# Altium PCB Remote Board.PcbDoc
Units mm, origin at the board's own origin, x right, y up, seen from the top; angles counter-clockwise.
Board outline 100 x 55 mm, 2 copper layers (Top Layer, Bottom Layer); 38 components, 37 nets, 162 pads, 45 vias.
Unrouted connection lines stored in the file: 4.
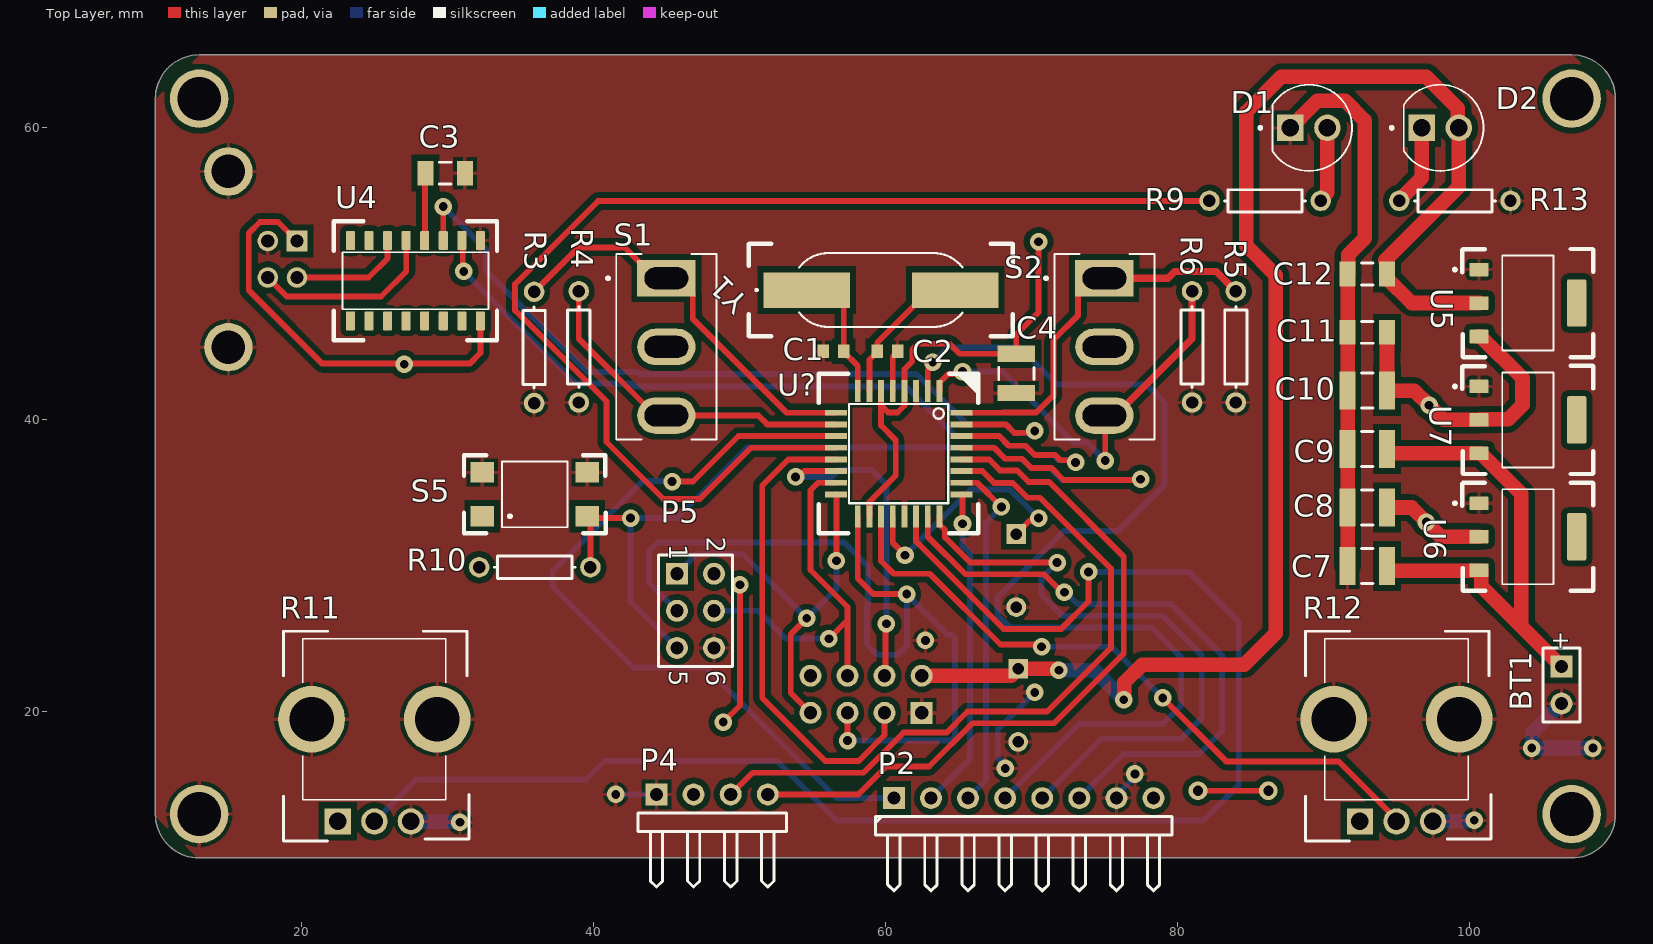
[diagram p0: Top Layer view]
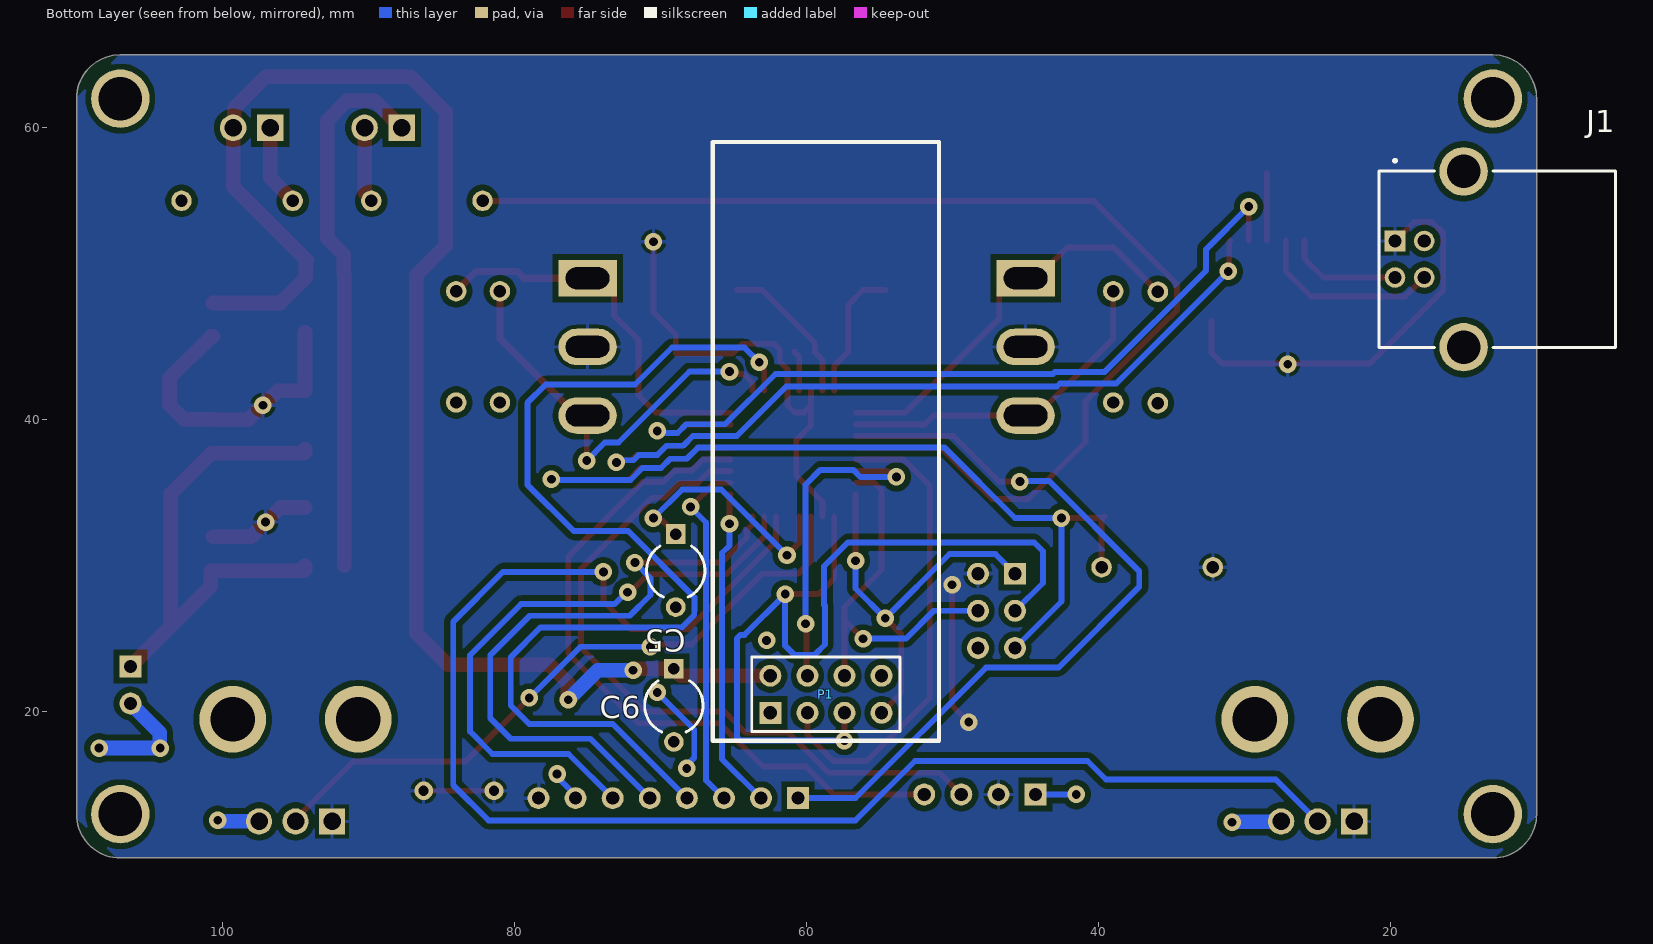
[diagram p1: Bottom Layer view, seen from below]

## Layer stack, top to bottom
Top Solder: solder mask 0.0102, Solder Resist, Dk 3.5
Top Layer: signal copper 0.0356
Dielectric 1: dielectric 0.32, FR-4, Dk 4.8
Bottom Layer: signal copper 0.0356
Bottom Solder: solder mask 0.0102, Solder Resist, Dk 3.5

## Board outline
10,13 ccw(c13,13) 13,10 107,10 ccw(c107,13) 110,13 110,62 ccw(c107,62) 107,65 13,65 ccw(c13,62) 10,62

## Design rules (kind name [scope] priority, off if disabled: settings)
Clearance [All] p1: gap=0.4 ignorepadtopadclearanceinfootprint=TRUE
Height [All] p1: minheight=0 maxheight=40 prefheight=12.7
PolygonConnect [All] p1: connectstyle=Relief reliefconductorwidth=0.254 reliefentries=4 polygonreliefangle="90 Angle" airgapwidth=0.254
RoutingTopology [All] p1: topology=Daisy_Balanced
RoutingVias [All] p1: holewidth=0.711 width=1.27 viastyle="Through Hole" minholewidth=0.711 minwidth=1.27 maxholewidth=0.711 maxwidth=1.27
SolderMaskExpansion [All] p1: expansion=0.102 istentingtop=FALSE
Width [All] p1: maxlimit=1 minlimit=0.4 preferedwidth=0.4
28 further rules are at their usual default settings.

## Components (designator, comment, footprint, x,y, rotation, side; value= is the part's Value field where it differs from the comment)
BT1 "Battery" BAT-2 106.299,21.844 r270 top
C1 "Cap Semi" 1608[0603] 56.45,44.704 r180 top value=22pF
C2 "Cap Semi" 1608[0603] 60.136,44.704 r0 top value=22pF
C3 "Cap Semi" C1206 29.845,56.896 r0 top value=0.1uF
C4 "Cap Semi" C1210 68.961,43.18 r270 top value=10uF
C5 "Cap2" CAPR5-4X5 68.961,29.678 r270 bottom value=0.1uF
C6 "Cap2" CAPR5-4X5 69.088,20.447 r270 bottom value=10uF
C7 "Cap" C1210 93,30 r180 top value=10uF
C8 "Cap" C1210 93,34 r180 top value=10uF
C9 "Cap" C1210 93,38 r180 top value=10uF
C10 "Cap" C1210 93,42 r180 top value=10uF
C11 "Cap" C1206 93,46 r180 top value=10uF
C12 "Cap" C1206 93,50 r180 top value=10uF
D1 "L08R5000Q1" LEDRD254W57D500H1070 89,60 r0 top
D2 "Power" LEDRD254W57D500H1070 98,60 r0 top
J1 "USB-B" SAMTEC_USB-B-S-X-X-TH 15,51 r90 bottom locked
P1 "nRF24+PA+LNA" nRF24+PA+LNA 58.674,21.209 r180 bottom
P2 "Header 8H" HDR1X8H 60.579,14.097 r0 top
P4 "LCD I2C" HDR1X4H 44.323,14.351 r0 top
P5 "ISP" HDR2X3 45.72,29.464 r270 top
R3 "Res1" AXIAL-0.3 35.941,44.958 r90 top value=1K
R4 "Res1" AXIAL-0.3 39,45 r90 top value=1K
R5 "Res1" AXIAL-0.3 84,45 r90 top value=1K
R6 "Res1" AXIAL-0.3 81,45 r90 top value=1K
R9 "Res1" AXIAL-0.3 86,55 r0 top value=150
R10 "Res1" AXIAL-0.3 35.985,29.907 r180 top value=1K
R11 "RPot_1" RV09AF4020KA54 25,16 r0 top locked value=1K
R12 "RPot_1" RV09AF4020KA54 95,16 r0 top locked value=1K
R13 "Res1" AXIAL-0.3 99,55 r0 top value=100
S1 "Left Toggle" SW_100SP1T1B4M2QE 45,45 r0 top locked
S2 "Right Toggle" SW_100SP1T1B4M2QE 75,45 r0 top locked
S5 "SW-PB" SW_TL3305AF160QG 35.985,34.901 r0 top
U4 "CH340C" SOIC127P600X180-16N 27.813,49.53 r270 top
U5 "AMS1117-3.3" SOT229P700X180-4N 104,48 r0 top
U6 "AMS1117-5V" SOT229P700X180-4N 104,32 r0 top
U7 "AMS1117-5V" SOT229P700X180-4N 104,40 r0 top
U? "ATMEGA328P-AU" QFP80P900X900X120-32N 60.904,37.692 r270 top
Y1 "16MHz Crystal" H32_RAM 59.69,48.895 r0 top

## Footprints (in the part's own frame and the unit in brackets; to place one, negate y for a bottom-side part, rotate by r counter-clockwise, add the part's x,y. Pads: shape width x height; smd on the part's side, far side on the other; paste and mask are expansions set on the pad)
1608[0603] [mm] "Chip Capacitor, Body 1.6x0.8mm, IPC High Density"
  rect 0.8x0.9 smd: 1(-0.7,0) 2(0.7,0)
  body extent -0.87,-0.48 0.87,0.48, height 1.3
AXIAL-0.3 [mm] "Axial Device, Thru-Hole; 2 Leads; 0.3 in Pin Spacing"
  round 1.4 hole 0.85: 1(-3.81,0) 2(3.81,0)
  silkscreen extent -2.77,-0.76 2.77,0.76
BAT-2 [mm] "Battery; 2 Leads"
  rect 1.5x1.5 hole 0.9: 1(-1.27,0)
  round 1.5 hole 0.9: 2(1.27,0)
  silkscreen extent -2.54,-1.27 2.54,1.27
C1206 [mm] "Chip Capacitor, Body 3.2x1.6mm, IPC High Density"
  rect 1.1x1.7 smd: 1(-1.35,0) 2(1.35,0)
  silkscreen extent -0.4,-0.75 0.4,0.75, body extent -1.7,-0.9 1.7,0.9, height 1.3
C1210 [mm] "Chip Capacitor, Body 3.2x2.5mm, IPC High Density"
  rect 1.1x2.6 smd: 1(-1.35,0) 2(1.35,0)
  silkscreen extent -0.4,-1.2 0.4,1.2, body extent -1.7,-1.35 1.7,1.35, height 1.3
CAPR5-4X5 [mm] "Capacitor; 2 Leads"
  rect 1.35x1.35 hole 0.8: 1(-2.5,0)
  round 1.35 hole 0.8: 2(2.5,0)
  silkscreen extent -1.69,-2 1.82,2
H32_RAM [mm]
  rect 5.912x2.432 smd paste+0 mask+0: 1(-5.088,0) 2(5.088,0)
  silkscreen extent -9.04,-3.18 9.04,3.18, body extent -7.54,-2.4 7.54,2.4, height 3.25
HDR1X4H [mm] "Connector; Header; 4 Position; Right Angle"
  rect 1.5x1.5 hole 0.9: 1(0,0)
  round 1.5 hole 0.9: 2(2.54,0) 3(5.08,0) 4(7.62,0)
  silkscreen extent -1.27,-6.35 8.89,-1.27
HDR1X8H [mm] "Connector; Header; 8 Position; Right Angle"
  rect 1.5x1.5 hole 0.9: 1(0,0)
  round 1.5 hole 0.9: 2(2.54,0) 3(5.08,0) 4(7.62,0) 5(10.16,0) 6(12.7,0) 7(15.24,0) 8(17.78,0)
  silkscreen extent -1.27,-6.35 19.05,-1.27
HDR2X3 [mm] "Connector; Header; 3x2 Position"
  rect 1.5x1.5 hole 0.9: 1(0,0)
  round 1.5 hole 0.9: 2(0,2.54) 3(2.54,0) 4(2.54,2.54) 5(5.08,0) 6(5.08,2.54)
  silkscreen extent -1.27,-1.27 6.35,3.81
LEDRD254W57D500H1070 [mm]
  round 1.815 hole 1.21: A(1.27,0)
  rect 1.815x1.815 / inner round 1.815 / far side rect 1.815x1.815 hole 1.21: C(-1.27,0)
  silkscreen extent -3.43,-2.96 2.96,2.96, body extent -2.6,-2.95 2.95,2.95, height 9.1
nRF24+PA+LNA [mm] "Connector; Header; 4x2 Position"
  rect 1.5x1.5 hole 0.9: 1(-3.81,-1.27)
  round 1.5 hole 0.9: 2(-3.81,1.27) 3(-1.27,-1.27) 4(-1.27,1.27) 5(1.27,-1.27) 6(1.27,1.27) 7(3.81,-1.27) 8(3.81,1.27)
  silkscreen extent -7.75,-3.18 7.75,37.83, body extent -7.75,-3.18 7.75,148.23, height 14.75
QFP80P900X900X120-32N [mm]
  rect 1.5x0.4 smd: 1(-4.3,2.8) 2(-4.3,2) 3(-4.3,1.2) 4(-4.3,0.4) 5(-4.3,-0.4) 6(-4.3,-1.2) 7(-4.3,-2) 8(-4.3,-2.8) 17(4.3,-2.8) 18(4.3,-2) 19(4.3,-1.2) 20(4.3,-0.4) 21(4.3,0.4) 22(4.3,1.2) 23(4.3,2) 24(4.3,2.8)
  rect 0.4x1.5 smd: 9(-2.8,-4.3) 10(-2,-4.3) 11(-1.2,-4.3) 12(-0.4,-4.3) 13(0.4,-4.3) 14(1.2,-4.3) 15(2,-4.3) 16(2.8,-4.3) 25(2.8,4.3) 26(2,4.3) 27(1.2,4.3) 28(0.4,4.3) 29(-0.4,4.3) 30(-1.2,4.3) 31(-2,4.3) 32(-2.8,4.3)
  silkscreen extent -5.46,-5.46 5.46,5.46, body extent -4.5,-4.5 4.5,4.5, height 1.21
RV09AF4020KA54 [mm]
  rect 1.8x1.8 hole 1.2: 1(-2.5,-3.5)
  round 1.8 hole 1.2: 2(0,-3.5) 3(2.5,-3.5)
  round 4.572 hole 3.048: 4(-4.3,3.5) 5(4.3,3.5)
  silkscreen extent -6.22,-4.83 6.48,9.53, body extent -5.73,-3.56 5.67,9.09, height 25
SAMTEC_USB-B-S-X-X-TH [mm]
  rect 1.408x1.408 hole 0.9: 1(1.25,4.7)
  round 1.408 hole 0.9: 2(-1.25,4.7) 3(-1.25,2.7) 4(1.25,2.7)
  round 3.316 hole 2.3: S1(-6.02,0) S2(6.02,0)
  silkscreen extent -6.05,-10.4 6.85,5.8, body extent -7.34,-10.54 7.16,5.96, height 10.7
SOIC127P600X180-16N [mm]
  rrect25% 1.31x0.62 smd: 1(-2.75,4.445) 2(-2.75,3.175) 3(-2.75,1.905) 4(-2.75,0.635) 5(-2.75,-0.635) 6(-2.75,-1.905) 7(-2.75,-3.175) 8(-2.75,-4.445) 9(2.75,-4.445) 10(2.75,-3.175) 11(2.75,-1.905) 12(2.75,-0.635) 13(2.75,0.635) 14(2.75,1.905) 15(2.75,3.175) 16(2.75,4.445)
  silkscreen extent -4.06,-5.59 4.06,5.59, body extent -3,-5 3,5, height 1.8
SOT229P700X180-4N [mm]
  rrect15% 1.31x0.93 smd: 1(-3.345,2.29) 2(-3.345,0) 3(-3.345,-2.29)
  rrect15% 1.31x3.24 smd: 4(3.345,0)
  silkscreen extent -5.1,-3.71 4.47,3.71, body extent -3.5,-3.25 3.5,3.25, height 1.8
SW_100SP1T1B4M2QE [mm]
  rect 4x2.5 hole 1.5 slot 3 at 0 deg: 1(0,4.7)
  oval 4x2.5 hole 1.5 slot 3 at 0 deg: 2(0,0) 3(0,-4.7)
  silkscreen extent -4.1,-6.35 3.43,6.35, body extent -3.43,-6.35 3.43,6.35, height 29.44
SW_TL3305AF160QG [mm]
  rect 1.6x1.4 smd: 1(-3.6,-1.5) 2(3.6,-1.5) 3(-3.6,1.5) 4(3.6,1.5)
  silkscreen extent -4.85,-2.67 4.85,2.67, body extent -3.6,-2.25 3.9,2.25, height 3.8

## Part data
BT1: "Multicell Battery", LatestRevisionDate=17-Jul-2002, LatestRevisionNote="Re-released for DXP Platform.", PackageDescription="Battery; 2 Leads", PackageReference=BAT-2, Published=24-Mar-1999, Publisher="Altium Limited"
C1 C2 C3 C4: "Capacitor (Semiconductor SIM Model)", LatestRevisionDate=29-May-2009, LatestRevisionNote="IPC-7351 Footprint Added.", PackageDescription="Chip Capacitor", PackageReference=C1206, Published=8-Jun-2000, Publisher="Altium Limited"
C5 C6: "Capacitor", PackageDescription="Capacitor; 2 Leads", PackageReference=CAPR5-4X5, Published=23-Sep-2002, Publisher="Altium Limited"
C7 C8 C9 C10 C11 C12: library part "Cap Semi", "Capacitor (Semiconductor SIM Model)", LatestRevisionDate=29-May-2009, LatestRevisionNote="IPC-7351 Footprint Added.", PackageDescription="Chip Capacitor", PackageReference=C1206, Published=8-Jun-2000, Publisher="Altium Limited"
D1: "LED, 5MM, ORANGE; LED / Lamp Size: 5mm / T-1 3/4; LED Colour: Orange; Typ Luminous Intensity: 4.3mcd; Viewing Angle: ...", Package=None, Availability="In Stock", Check_prices=https://www.snapeda.com/parts/L08R5000Q1/LED+Technology/view-part/?ref=eda, MF="LED Technology", MP=L08R5000Q1, Price=None, SnapEDA_Link=https://www.snapeda.com/parts/L08R5000Q1/LED+Technology/view-part/?ref=snap
D2: library part L08R5000Q1, "LED, 5MM, ORANGE; LED / Lamp Size: 5mm / T-1 3/4; LED Colour: Orange; Typ Luminous Intensity: 4.3mcd; Viewing Angle: ...", Package=None, Availability="In Stock", Check_prices=https://www.snapeda.com/parts/L08R5000Q1/LED+Technology/view-part/?ref=eda, MF="LED Technology", MP=L08R5000Q1, Price=None, SnapEDA_Link=https://www.snapeda.com/parts/L08R5000Q1/LED+Technology/view-part/?ref=snap
J1: library part USB-B-S-X-X-TH, "USB-B (USB TYPE-B) USB 2.0 Receptacle Connector 4 Position Through Hole, Right Angle", Package=None, Check_prices=https://www.snapeda.com/parts/USB-B-S-S-B-TH/Samtec+Inc./view-part/?ref=eda, Digi-Key_Part_Number=SAM10869-ND, MF=Samtec, MP=USB-B-S-S-B-TH, Purchase-URL=https://pricing.snapeda.com/search/part/USB-B-S-S-B-TH/?ref=eda, SnapEDA_Link=https://www.snapeda.com/parts/USB-B-S-S-B-TH/Samtec+Inc./view-part/?ref=snap
P1: "Header, 4-Pin, Dual row", LatestRevisionDate=17-Jul-2002, LatestRevisionNote="Re-released for DXP Platform.", Publisher="Altium Limited"
P2: "Header, 8-Pin, Right Angle", LatestRevisionDate=17-Jul-2002, LatestRevisionNote="Re-released for DXP Platform.", Publisher="Altium Limited"
P4: library part "Header 4H", "Header, 4-Pin, Right Angle", LatestRevisionDate=17-Jul-2002, LatestRevisionNote="Re-released for DXP Platform.", Publisher="Altium Limited"
P5: library part "Header 3X2", "Header, 3-Pin, Dual row", LatestRevisionDate=17-Jul-2002, LatestRevisionNote="Re-released for DXP Platform.", Publisher="Altium Limited"
R3 R4 R5 R6 R9 R10 R13: "Resistor", LatestRevisionDate=17-Jul-2002, LatestRevisionNote="Re-released for DXP Platform.", PackageDescription="Axial Device, Thru-Hole; 2 Leads; 0.3 in Pin Spacing", PackageReference=AXIAL-0.3, Published=8-Jun-2000, Publisher="Altium Limited"
R11 R12: "Potentiometer", LatestRevisionDate=17-Jul-2002, LatestRevisionNote="Re-released for DXP Platform.", PackageDescription="Variable Resistor, Thru-Hole; 3 Leads", PackageReference=VR5, Published=8-Jun-2000, Publisher="Altium Limited", Set Position=0.5, Sim Note="Enter the Resistance value and the set point into parameter fields."
S1 S2: library part 100SP1T1B4M2QE, "Toggle Switch SPDT Through Hole", Package=None, Availability=Unavailable, MP=100SP1T1B4M2QE, Price=None
S5: "Switch", LatestRevisionDate=17-Jul-2002, LatestRevisionNote="Re-released for DXP Platform.", PackageDescription="Switch; 2 Leads", PackageReference=SPST-2, Published=24-Mar-1999, Publisher="Altium Limited"
U4: "USB to serial chip CH340", Package=None, Availability="Not in stock", Check_prices=https://www.snapeda.com/parts/CH340C/WCH/view-part/?ref=eda, MF=WCH, MP=CH340C, Price=None, SnapEDA_Link=https://www.snapeda.com/parts/CH340C/WCH/view-part/?ref=snap
U5: "Sot223/Pkg 1-Amp 3.3-Volt Low Drop Out Voltage Regulatator", Package="SOT-223 Seeed Technology", Availability="Not in stock", Check_prices=https://www.snapeda.com/parts/AMS1117-3.3/Advanced+Monolithic+Systems/view-part/?ref=eda, MF="Advanced Monolithic Systems", MP=AMS1117-3.3, Price=None, SnapEDA_Link=https://www.snapeda.com/parts/AMS1117-3.3/Advanced+Monolithic+Systems/view-part/?ref=snap
U6 U7: library part AMS1117-3.3, "Sot223/Pkg 1-Amp 3.3-Volt Low Drop Out Voltage Regulatator", Package="SOT-223 Seeed Technology", Availability="Not in stock", Check_prices=https://www.snapeda.com/parts/AMS1117-3.3/Advanced+Monolithic+Systems/view-part/?ref=eda, MF="Advanced Monolithic Systems", MP=AMS1117-3.3, Price=None, SnapEDA_Link=https://www.snapeda.com/parts/AMS1117-3.3/Advanced+Monolithic+Systems/view-part/?ref=snap
U?: "AVR AVRÂ® ATmega Microcontroller IC 8-Bit 20MHz 32KB (16K x 16) FLASH 32-TQFP (7x7)", Package="TQFP-32 Microchip", Availability="In Stock", Check_prices=https://www.snapeda.com/parts/ATMEGA328P-AU/Microchip/view-part/?ref=eda, MF="Microchip Technology", MP=ATMEGA328P-AU, Price=None, Purchase-URL=https://pricing.snapeda.com/search/part/ATMEGA328P-AU/?ref=eda, SnapEDA_Link=https://www.snapeda.com/parts/ATMEGA328P-AU/Microchip/view-part/?ref=snap
Y1: library part HC49/US-10.244MHZ-16PF-30-EXT-SMD-H32-TR, "No Description Available", Mfr_Name="Rami Technology", Copyright="Copyright (C) 2023 Ultra Librarian. All rights reserved.", Manufacturer_Part_Number=HC49/US-10.244MHZ-16PF-30-EXT-SMD-H32-TR, RefDes=RefDes, Type=DEV

## Free pads (board coordinates)
  round 4 hole 3: 17(13,13) 17(13,62) 17(107,13) 17(107,62)

## Via types
v1: diameter 1.2, hole 0.6, Top Layer to Bottom Layer, 43 vias
v2: diameter 1.27, hole 0.711, Top Layer to Bottom Layer, 2 vias

## Nets (pads, with @x,y where several pads share a name; then routed paths per layer and width w, separated by ;. In a path a pad name is that pad's centre, name@x,y a point inside that pad or via, vN(x,y) a via of type N, cw(c..) or ccw(c..) an arc to the next point about the centre after c; other vN are vias at no path point)
+3.3: C6.1 C12.1 D2.A P1.2 U5.2 | length 101.6
  Top Layer w1: P1.2 68.62,22.479 C6.1 71.741,22.947 71.828,22.86 v1(71.882,22.86) ; v1(76.327,20.828) 76.365,20.866 76.365,22.015 77.591,23.241 84.582,23.241 86.741,25.4 86.741,49.911 84.709,51.943 84.709,61.087 87.122,63.5 97.034,63.5 99.2,61.335 99.2,60.07 D2.A 99.27,55.963 94.234,50.927 94.3,50.861 94.3,49.75 96.044,48.006 100.649,48.006 U5.2
  Bottom Layer w1: v1(71.882,22.86) 74.295,22.86 v1(76.327,20.828)
+5: C4.1 C8.1 C10.1 C11.1 J1.1 P2.8 P4.2 P5.2 R10.2 R11.1 R12.1 S1.2 S2.2 U4.16 U5.3 U6.2 U7.2 U?.4 U?.6 U?.18 | length 102.6
  Top Layer w0.4: J1.1 18.396,53.554 17.16,53.554 16.396,52.79 16.396,48.882 21.424,43.854 31.535,43.854 32.258,44.577 32.258,46.435 U4.16 ; v1(48.895,19.304) 50.038,20.447 v1(50.038,28.702) ; U?.18 58.904,34.391 60.706,36.193 60.706,38.608 59.69,39.624 59.69,40.589 59.704,40.603 59.704,40.993 ; U?.6 59.704,40.993 ; v1(70.485,52.197) 70.485,47.371 68.961,45.847 C4.1 65.071,44.53 64.389,45.212 62.23,45.212 61.836,44.818 61.836,44.005 61.304,43.473 U?.4 61.304,40.984 60.833,40.513 60.184,40.513 59.704,40.993 ; v2(81.407,14.605) v2(86.233,14.605)
  Top Layer w1: C8.1 96.048,34 98.048,32 U6.2 ; C11.1 C10.1 96.229,42 v1(97.229,41) 98.229,40 U7.2 100.69,40.035 102.646,40.035 103.632,41.021 103.632,42.853 100.775,45.71 U5.3
  other v1: 97.048,33 27.051,43.815
GND: BT1.2 C1.2 C2.2 C3.2 C4.2 C5.2 C6.2 C7.2 C8.2 C9.2 C10.2 C11.2 C12.2 D1.C J1.4 J1.S1 J1.S2 P1.1 P2.7 P4.1 P5.6 pad.17@13,13 R3.1 R4.1 R5.1 R6.1 R11.3 R11.4 R11.5 R12.3 R12.4 R12.5 R13.2 S5.3 S5.4 U4.1 U5.1 U6.1 U7.1 U?.3 U?.5 U?.21 | length 66
  Top Layer w0.4: U?.5 60.504,44.322 60.836,44.654 C2.2
  Top Layer w1: D1.C 88.463,60.732 88.463,60.749 89.563,61.849 91.489,61.849 92.837,60.501 92.837,52.451 91.694,51.308 91.694,50.044 C12.2 C11.2 C10.2 C9.2 C8.2 C7.2
  Bottom Layer w0.4: v1(41.529,14.351) P4.1 ; v1(68.199,16.129) 68.199,16.345 67.691,16.853 67.691,18.796 v1(70.231,21.336) ; P2.7 75.819,14.288 77.089,15.558 v1(77.089,15.748)
  Bottom Layer w1: R11.3 27.527,12.473 30.834,12.473 v1(30.861,12.446) ; R12.3 100.203,12.5 100.276,12.573 v1(100.33,12.573) ; BT1.2 104.305,18.58 104.305,17.564 v1(104.267,17.526) v1(108.458,17.526)
  other v1: 62.738,24.892
NetC3_1: C3.1 U4.4 | length 4.6
  Top Layer w0.4: U4.4 28.471,52.304 28.471,56.873 C3.1
NetC5_1: C5.1 U?.20 | length 16.8
  Top Layer w0.4: U?.20 60.504,31.594 61.341,30.757 v1(61.341,30.734) ; C5.1 69.904,33.121 70.332,33.121 v1(70.485,33.274)
  Bottom Layer w0.4: v1(61.341,30.734) 65.843,35.236 68.523,35.236 v1(70.485,33.274)
NetD1_A: D1.A R9.2 | length 5.2
  Top Layer w1: R9.2 89.81,55.108 90.27,55.568 D1.A
NetD2_C: D2.C R13.1 | length 5.6
  Top Layer w1: R13.1 95.19,55.031 96.73,56.571 D2.C
NetJ1_2: J1.2 U4.6 | length 8
  Top Layer w0.4: J1.2 24.604,49.75 25.908,51.054 U4.6
NetJ1_3: J1.3 U4.5 | length 12.8
  Top Layer w0.4: J1.3 19.004,48.446 25.459,48.446 27.178,50.165 U4.5
NetP1_3: P1.3 U?.13 | length 32.8
  Top Layer w0.4: U?.13 54.668,37.292 53.351,37.292 51.562,35.503 51.562,20.955 55.88,16.637 58.166,16.637 59.944,18.415 P1.3
NetP1_4: P1.4 U?.14 | length 22.9
  Top Layer w0.4: v1(53.848,36.092) 54.064,36.092 54.464,36.492 U?.14 ; P1.4 60.008,22.543 60.008,25.971 v1(60.071,26.035)
  Bottom Layer w0.4: v1(53.848,36.092) 56.318,36.092 56.802,36.576 59.055,36.576 60.071,35.56 v1(60.071,26.035)
NetP1_5: P1.5 P5.3 U?.17 | length 61.7
  Top Layer w0.4: v1(57.404,18.034) P1.5 ; U?.17 58.104,29.145 59.182,28.067 v1(61.468,28.067)
  Bottom Layer w0.4: P5.3 43.815,28.829 43.815,31.008 44.421,31.614 57.159,31.614 58.801,29.972 58.801,27.325 58.744,27.268 58.744,24.62 59.447,23.917 60.853,23.917 61.468,24.533 v1(61.468,28.067) 64.262,25.273 64.536,25.273 64.77,25.039 64.77,18.268 64.536,18.034 v1(57.404,18.034)
NetP1_6: P1.6 P5.4 U?.15 | length 26.2
  Top Layer w0.4: v1(56.134,25.019) 57.404,26.289 ; U?.15 55.377,35.692 54.864,35.179 54.864,29.718 57.404,27.178 57.404,26.289 ; P1.6 57.404,26.289
  Bottom Layer w0.4: P5.4 51.285,26.924 53.19,25.019 v1(56.134,25.019)
NetP1_7: P1.7 P5.1 U?.16 | length 28.1
  Top Layer w0.4: v1(54.61,26.416) 53.514,25.32 53.514,21.289 P1.7 ; U?.16 56.642,34.892 v1(56.642,30.353)
  Bottom Layer w0.4: P5.1 47.07,30.814 50.212,30.814 v1(54.61,26.416) 56.642,28.448 v1(56.642,30.353)
NetP2_1: P2.1 U?.11 | length 53.7
  Top Layer w0.4: v1(45.389,35.776) 46.825,35.776 49.941,38.892 U?.11
  Bottom Layer w0.4: v1(45.389,35.776) 45.351,35.814 43.388,35.814 37.211,29.637 37.211,28.575 42.752,23.034 47.705,23.034 56.642,14.097 P2.1
NetP2_2: P2.2 U?.25 | length 22.2
  Top Layer w0.4: U?.25 65.278,34.892 v1(65.278,32.893)
  Bottom Layer w0.4: P2.2 65.786,16.764 65.786,30.881 65.278,31.389 v1(65.278,32.893)
NetP2_3: P2.3 U?.26 | length 24.3
  Top Layer w0.4: U?.26 66.289,35.692 v1(67.945,34.036)
  Bottom Layer w0.4: P2.3 66.886,15.324 66.886,32.977 v1(67.945,34.036)
NetP2_4: P2.4 U?.2 | length 73.2
  Top Layer w0.4: U?.2 62.904,43.384 63.246,43.726 v1(63.246,43.942)
  Bottom Layer w0.4: v1(63.246,43.942) 64.262,44.958 69.215,44.958 71.745,42.428 77.861,42.428 79.121,41.168 79.121,35.56 75.946,32.385 72.217,32.385 67.686,27.854 67.686,26.924 67.691,26.919 67.691,26.645 68.555,25.781 78.232,25.781 80.264,23.749 80.264,20.447 78.994,19.177 73.279,19.177 P2.4
NetP2_5: P2.5 U?.24 | length 42.8
  Top Layer w0.4: U?.24 63.704,32.842 64.078,32.468 64.078,31.957 65.809,30.226 v1(71.755,30.226)
  Bottom Layer w0.4: P2.5@70.739,14.103 74.797,18.161 80.264,18.161 81.661,19.558 81.661,23.876 78.956,26.581 72.108,26.581 70.682,28.007 70.682,29.153 v1(71.755,30.226)
NetP2_6: P2.6 U?.23 | length 41.8
  Top Layer w0.4: U?.23 62.904,31.999 65.477,29.426 70.858,29.426 72.09,28.194 v1(72.263,28.194)
  Bottom Layer w0.4: v1(72.263,28.194) 72.334,28.194 73.147,27.381 79.553,27.381 83.058,23.876 83.058,18.669 81.512,17.123 76.305,17.123 P2.6
NetP3_2: 
NetP3_10: 
NetP4_3: P4.3 U?.27 | length 48.6
  Top Layer w0.4: P4.3 50.889,15.837 58.497,15.837 61.249,18.589 64.194,18.589 65.627,20.022 71.076,20.022 75.438,24.384 75.438,29.827 70.594,34.671 69.723,34.671 68.707,35.687 67.437,35.687 66.632,36.492 U?.27
NetP4_4: P4.4 U?.28 | length 48.9
  Top Layer w0.4: P4.4 58.143,14.351 60.048,16.256 62.992,16.256 65.958,19.222 71.546,19.222 76.327,24.003 76.327,30.627 71.197,35.756 69.804,35.756 69.016,36.544 67.862,36.544 67.83,36.576 67.818,36.576 67.102,37.292 U?.28
NetP5_5: P5.5 R10.1 S5.1 S5.2 U?.29 | length 67.7
  Top Layer w0.4: S5.2 S5.2@39.712,33.274 ; R10.1 39.795,33.191 S5.2@39.712,33.274 ; v1(42.545,33.274) S5.2@39.712,33.274 ; U?.29 67.445,38.092 68.193,37.344 69.348,37.344 69.989,36.703 71.382,36.703 72.201,35.884 77.413,35.884 v1(77.47,35.941)
  Bottom Layer w0.4: P5.5 42.545,27.559 v1(42.545,33.274) 45.72,33.274 50.546,38.1 67.437,38.1 68.199,37.338 69.342,37.338 69.977,36.703 71.247,36.703 72.066,35.884 77.413,35.884 v1(77.47,35.941)
NetR3_2: R3.2 S1.1 U?.9 | length 27.6
  Top Layer w0.4: R3.2 38.989,51.816 42.134,51.816 44.25,49.7 S1.1 45.75,49.7 46.8,48.65 46.8,46.926 53.234,40.492 U?.9
NetR4_2: R4.2 S1.3 U?.10 | length 23.3
  Top Layer w0.4: R4.2 39,45.55 44.25,40.3 S1.3 51.291,40.3 51.899,39.692 U?.10
NetR5_2: R5.2 S2.1 U?.32 | length 26.5
  Top Layer w0.4: U?.32 68.038,40.492 68.049,40.503 70.333,40.503 71.501,41.671 71.501,45.466 73.2,47.165 73.2,48.65 74.25,49.7 S2.1
  Top Layer w0.5: S2.1 79.348,49.7 79.808,50.16 82.65,50.16 R5.2
NetR6_2: R6.2 S2.3 U?.1 | length 29.3
  Top Layer w0.4: U?.1 63.704,42.542 64.316,43.154 65.125,43.154 v1(65.278,43.307) ; S2.3 75.057,40.243 v1(75.057,37.211)
  Top Layer w0.5: S2.3@75.029,40.3 75.75,40.3 81,45.55 R6.2
  Bottom Layer w0.4: v1(65.278,43.307) 68.025,43.307 72.882,38.45 73.818,38.45 v1(75.057,37.211)
NetR9_1: R9.1 U?.12 | length 82.1
  Top Layer w0.4: U?.12 54.999,38.092 50.8,38.092 47.284,34.576 44.799,34.576 40.894,38.481 40.894,41.275 35.179,46.99 35.14,46.99 34.641,47.489 34.641,49.306 40.326,54.991 82.181,54.991 R9.1
NetR11_2: R11.2 U?.22 | length 105.3
  Top Layer w0.4: U?.22 62.104,31.668 68.083,25.689 72.044,25.689 73.914,27.559 v1(73.914,29.591)
  Bottom Layer w0.4: R11.2 27.867,15.367 39.497,15.367 40.767,16.637 52.578,16.637 56.642,12.573 81.788,12.573 84.201,14.986 84.201,26.182 80.792,29.591 v1(73.914,29.591)
NetR12_2: R12.2 U?.19 | length 45.8
  Top Layer w0.4: U?.19 59.704,30.339 60.579,29.464 63.027,29.464 67.875,24.616 70.542,24.616 v1(70.695,24.463) ; v1(78.994,20.955) 83.335,16.614 91.035,16.614 95,12.649 R12.2
  Bottom Layer w0.4: v1(70.695,24.463) 75.486,24.463 v1(78.994,20.955)
NetU4_2: U4.2 U?.30 | length 58.1
  Top Layer w0.4: U4.2 31.052,52.217 31.052,50.228 v1(31.115,50.165) ; U?.30 67.788,38.892 68.453,38.227 69.596,38.227 70.231,37.592 71.624,37.592 71.979,37.237 72.872,37.237 v1(73.025,37.084)
  Bottom Layer w0.4: v1(31.115,50.165) 38.79,42.49 42.647,42.49 42.846,42.291 61.391,42.291 64.782,38.9 67.78,38.9 68.453,38.227 69.596,38.227 70.231,37.592 71.501,37.592 71.856,37.237 72.872,37.237 v1(73.025,37.084)
NetU4_3: U4.3 U?.31 | length 55.5
  Top Layer w0.4: U4.3 v1(29.718,54.61) ; U?.31 68.25,39.692 68.841,39.1 69.184,39.1 69.198,39.115 70.102,39.115 v1(70.232,39.245)
  Bottom Layer w0.4: v1(29.718,54.61) 32.637,51.691 32.637,50.234 39.581,43.29 42.978,43.29 43.118,43.15 62.133,43.15 65.583,39.7 68.242,39.7 68.841,39.1 69.734,39.1 69.748,39.115 70.102,39.115 v1(70.232,39.245)
VBat: BT1.1 C7.1 C9.1 U6.3 U7.3 | length 35.3
  Top Layer w1: C7.1 94.35,29.725 94.4,29.675 100.81,29.675 100.81,28.603 103.555,25.858 ; C9.1 94.35,37.76 94.4,37.71 U7.3 100.775,37.71 103.555,34.931 103.555,25.858 ; BT1.1 103.555,25.858
XTAL1: C2.1 U?.7 Y1.2 | length 10.4
  Top Layer w0.4: U?.7 58.904,44.122 59.436,44.654 C2.1 59.436,45.293 63.038,48.895 Y1.2
XTAL2: C1.1 U?.8 Y1.1 | length 9.3
  Top Layer w0.4: Y1.1 56.134,48.895 57.15,47.879 C1.1 57.15,44.654 58.104,43.7 U?.8
pads on no net: P1.8 U4.7 U4.8 U4.9 U4.10 U4.11 U4.12 U4.13 U4.14 U4.15 U5.4 U6.4 U7.4

## Polygon pours and split planes (outlines as drawn)
+5 on Bottom Layer "+5_L02_P000" (solid, pour order 0): 10.009,61.973 13.06,65.024 107.061,65.024 109.982,62.103 109.982,12.7 107.315,10.033 12.827,10.033 10.033,12.827 10.033,61.976
GND on Top Layer "GND_L01_P001" (solid, pour order 1): 10.003,61.942 10.003,61.946 13.081,65.024 107.061,65.024 109.982,62.103 109.982,12.7 107.315,10.033 12.827,10.033 10.033,12.827 10.033,61.976

## Silkscreen, mask and mechanical layers (free items; w line width, h text height)
Mechanical 5:
  the board outline again, w0.01

## Text inside footprints (layer, text, board x,y; h text height)
BT1: Top Overlay "+" at 105.722,25.514 h1.15 r270
P5: Top Overlay "6" at 47.752,22.86 h1.27 r270; Top Overlay "5" at 45.212,22.86 h1.27 r270; Top Overlay "2" at 47.752,32.004 h1.27 r270; Top Overlay "1" at 45.212,31.496 h1.27 r270